# Altium PCB MGMEZZ04.PcbDoc (part 4 of 9)
Units mil, origin at the board's own origin, x right, y up, seen from the top; angles counter-clockwise.
Board outline 3790 x 5472.44 mil, 10 copper layers (TopLayer, InternalPlane1, MidLayer1, InternalPlane2, MidLayer2, MidLayer3, InternalPlane3, MidLayer4, InternalPlane4, BottomLayer), stack 57.08 mil thick; 846 components, 745 nets, 3323 pads, 1906 vias.
Unrouted connection lines stored in the file: 128.
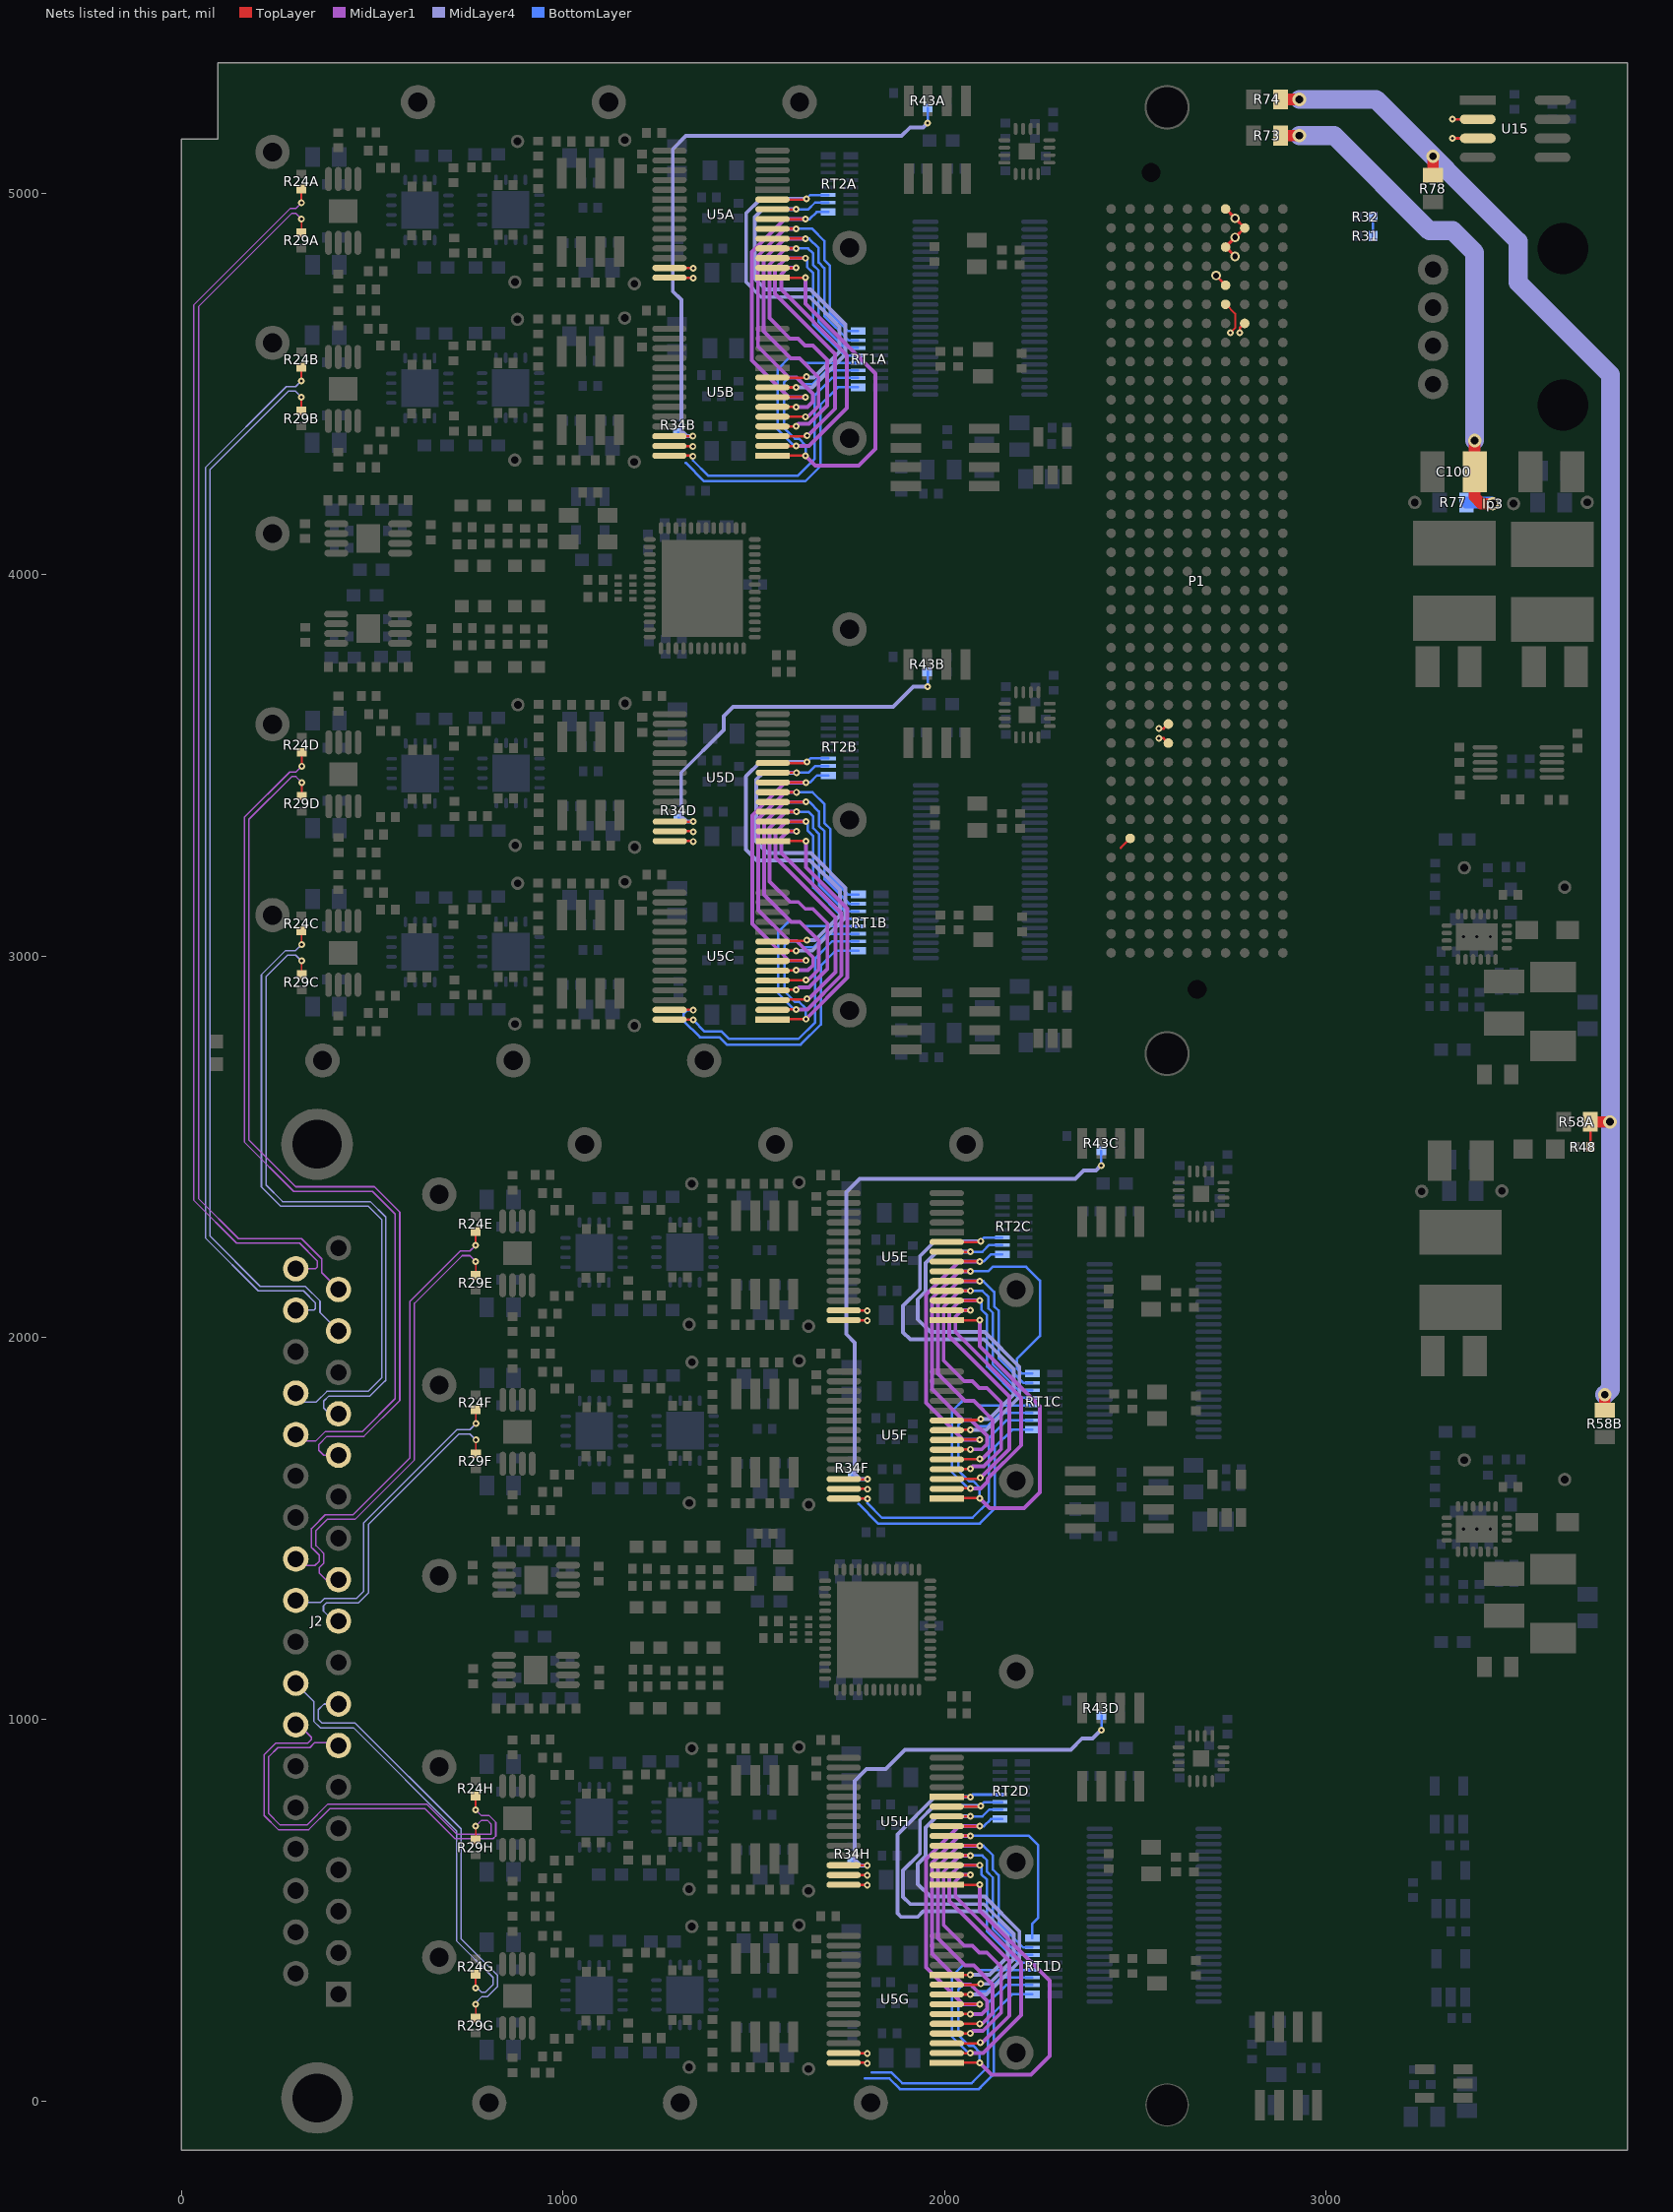
[diagram p12: the nets of this part, all layers, seen from the top]

## Via types
v1: diameter 18, hole 8, TopLayer to BottomLayer, 1296 vias
v2: diameter 18, hole 8, TopLayer to BottomLayer, tented both sides, 203 vias
v3: diameter 19.68, hole 7.87, TopLayer to BottomLayer, 188 vias
v4: diameter 25, hole 15, TopLayer to BottomLayer, tented both sides, 99 vias
v5: diameter 25, hole 15, TopLayer to BottomLayer, 72 vias
v6: diameter 35, hole 20, TopLayer to BottomLayer, 48 vias

## Nets (pads, with @x,y where several pads share a name; then routed paths per layer and width w, separated by ;. In a path a pad name is that pad's centre, name@x,y a point inside that pad or via, vN(x,y) a via of type N, cw(c..) or ccw(c..) an arc to the next point about the centre after c; other vN are vias at no path point) (continued)
DACDATA4G: RT2D.12 U5G.10 U5H.10 | length 1147.7
  TopLayer w6.5: U5G.10@2005.37,330.08 v1(2067.2,330.08) ; U5H.10@2005.61,796.74 v1(2067.44,796.74)
  MidLayer4 w10: v1(2067.2,330.08) 2118.47,330.08 2166.2,377.81 2166.2,431.64 2101.36,496.48 1944.4,496.48 1929.92,482 1886.18,482 1876.44,491.74 1876.44,698.23 1974.95,796.74 v1(2067.44,796.74)
  BottomLayer w6.5: v1(2067.44,796.74) 2073.4,802.69 RT2D.12@2151.5,802.69
DACDATA5A: RT2A.11 U5A.9 U5B.9 | length 1074.7
  TopLayer w6.5: U5B.9@1548.86,4516.79 1635.79,4516.79 v1(1638,4519) ; U5A.9@1549.11,4983.45 1636.03,4983.45 v1(1638.25,4985.66)
  MidLayer4 w10: v1(1638,4519) 1637.91,4519 1635.69,4516.79 1657.58,4516.79 1724.69,4583.9 1724.69,4650.16 1646.79,4728.07 1518.93,4728.07 1480.11,4766.89 1480.11,4947.68 1518.09,4985.66 v1(1638.25,4985.66)
  BottomLayer w6.5: v1(1638.25,4985.66) 1647.9,4995.31 RT2A.11@1695,4995.31
DACDATA5C: RT2B.11 U5C.9 U5D.9 | length 1076.8
  TopLayer w6.5: U5C.9@1549.68,3040.12 1636.6,3040.12 v1(1638.81,3042.34) ; U5D.9@1549.92,3506.79 1636.85,3506.79 v1(1639.06,3509)
  MidLayer4 w10: v1@1638.72,3042.34 1660.61,3042.34 1725.51,3107.24 1725.51,3173.5 1647.6,3251.4 1508.21,3251.4 1479.92,3279.69 1479.92,3471.5 1517.43,3509 v1(1639.06,3509)
  BottomLayer w6.5: v1(1639.06,3509) 1648.71,3518.65 RT2B.11@1695.81,3518.65
DACDATA5E: RT2C.11 U5E.9 U5F.9 | length 1144.1
  TopLayer w6.5: U5F.9@2005.37,1784.48 2092.29,1784.48 v1(2094.5,1786.69) ; U5E.9@2005.61,2251.14 2092.54,2251.14 v1(2094.75,2253.35)
  MidLayer4 w10: v1@2094.41,1786.69 2116.29,1786.69 2181.2,1851.59 2181.2,1917.85 2103.29,1995.76 1910.16,1995.76 1891.44,2014.48 1891.44,2083.94 1935.61,2128.11 1935.61,2214.56 1974.4,2253.35 v1(2094.75,2253.35)
  BottomLayer w6.5: v1(2094.75,2253.35) 2104.4,2263 RT2C.11@2151.5,2263
DACDATA5G: RT2D.11 U5G.9 U5H.9 | length 1145.1
  TopLayer w6.5: U5G.9@2005.37,304.48 2092.29,304.48 v1(2094.5,306.69) ; U5H.9@2005.61,771.14 2092.54,771.14 v1(2094.75,773.35)
  MidLayer4 w10: v1@2094.41,306.69 2116.29,306.69 2181.2,371.59 2181.2,437.85 2103.29,515.76 1910.16,515.76 1891.44,534.48 1891.44,603.94 1935.61,648.11 1935.61,736.19 1972.78,773.35 v1(2094.75,773.35)
  BottomLayer w6.5: v1(2094.75,773.35) 2104.4,783 RT2D.11@2151.5,783
DACDATA6A: RT2A.10 U5A.8 U5B.8 | length 1022.4
  TopLayer w6.5: U5B.8@1548.86,4491.19 v1(1610.69,4491.19) ; U5A.8@1549.11,4957.85 v1(1610.94,4957.85)
  MidLayer4 w10: v1(1610.69,4491.19) 1653.19,4491.19 1739.69,4577.69 1739.69,4656.37 1648.58,4747.49 1531.79,4747.49 1503,4776.28 1503,4937.2 1523.65,4957.85 v1(1610.94,4957.85)
  BottomLayer w6.5: v1(1610.94,4957.85) 1642.85,4957.85 1660.63,4975.63 RT2A.10@1695,4975.63
DACDATA6C: RT2B.10 U5C.8 U5D.8 | length 1017.6
  TopLayer w6.5: U5C.8@1549.68,3014.52 v1(1611.51,3014.52) ; U5D.8@1549.92,3481.19 v1(1611.75,3481.19)
  MidLayer4 w10: v1(1611.51,3014.52) 1654,3014.52 1740.51,3101.03 1740.51,3179.71 1649.4,3270.82 1536.18,3270.82 1507,3300 1507,3463.72 1524.46,3481.19 v1(1611.75,3481.19)
  BottomLayer w6.5: v1(1611.75,3481.19) 1643.66,3481.19 1661.44,3498.97 RT2B.10@1695.81,3498.97
DACDATA6E: RT2C.10 U5E.8 U5F.8 | length 1060.8
  TopLayer w6.5: U5F.8@2005.37,1758.88 v1@2067.2,1758.88 ; U5E.8@2005.61,2225.54 v1(2067.44,2225.54)
  MidLayer4 w10: v1(2067.44,2225.54) 1980.15,2225.54 1950.61,2196 1950.61,2121.89 1929.85,2101.13 1929.85,2048.17 1962.85,2015.18 2105.09,2015.18 2196.2,1924.06 2196.2,1845.38 2109.69,1758.88 v1(2068.2,1758.88)
  BottomLayer w6.5: v1(2067.44,2225.54) 2099.35,2225.54 2117.13,2243.32 RT2C.10@2151.5,2243.32
DACDATA6G: RT2D.10 U5G.8 U5H.8 | length 1061.8
  TopLayer w6.5: U5G.8@2005.37,278.88 v1(2067.2,278.88) ; U5H.8@2005.61,745.54 v1(2067.44,745.54)
  MidLayer4 w10: v1(2067.2,278.88) 2109.69,278.88 2196.2,365.38 2196.2,444.06 2105.09,535.18 1962.85,535.18 1929.85,568.17 1929.85,621.13 1950.61,641.89 1950.61,716 1980.15,745.54 v1(2067.44,745.54)
  BottomLayer w6.5: v1(2067.44,745.54) 2099.35,745.54 2117.13,763.32 RT2D.10@2151.5,763.32
DACDATA7A: RT2A.9 U5A.7 U5B.7 | length 881.8
  TopLayer w6.5: U5B.7@1548.86,4465.59 v1(1635.69,4465.59) ; U5A.7@1549.11,4932.25 v1(1635.94,4932.25)
  MidLayer1 w10: v1(1635.69,4465.59) 1591.41,4465.59 1495,4562 1495,4846 1581.25,4932.25 v1(1635.94,4932.25)
  BottomLayer w6.5: v1(1635.94,4932.25) 1646.22,4932.25 1665,4951.02 RT2A.9@1695,4951.02
DACDATA7C: RT2B.9 U5C.7 U5D.7 | length 881.8
  TopLayer w6.5: U5C.7@1549.68,2988.92 v1(1636.51,2988.92) ; U5D.7@1549.92,3455.59 v1(1636.75,3455.59)
  MidLayer1 w10: v1(1636.51,2988.92) 1592.23,2988.92 1495.81,3085.34 1495.81,3369.34 1582.06,3455.59 v1(1636.75,3455.59)
  BottomLayer w6.5: v1(1636.75,3455.59) 1647.04,3455.59 1665.81,3474.36 RT2B.9@1695.81,3474.36
DACDATA7E: RT2C.9 U5E.7 U5F.7 | length 881.8
  TopLayer w6.5: U5F.7@2005.37,1733.28 v1(2092.2,1733.28) ; U5E.7@2005.61,2199.94 v1(2092.44,2199.94)
  MidLayer1 w10: v1(2092.2,1733.28) 2047.92,1733.28 1951.5,1829.69 1951.5,2113.69 2037.75,2199.94 v1(2092.44,2199.94)
  BottomLayer w6.5: v1(2092.44,2199.94) 2102.73,2199.94 2121.5,2218.71 RT2C.9@2151.5,2218.71
DACDATA7G: RT2D.9 U5G.7 U5H.7 | length 881.8
  TopLayer w6.5: U5G.7@2005.37,253.28 v1(2092.2,253.28) ; U5H.7@2005.61,719.94 v1(2092.44,719.94)
  MidLayer1 w10: v1(2092.2,253.28) 2047.92,253.28 1951.5,349.69 1951.5,633.69 2037.75,719.94 v1(2092.44,719.94)
  BottomLayer w6.5: v1(2092.44,719.94) 2102.73,719.94 2121.5,738.71 RT2D.9@2151.5,738.71
DACDATA8A: RT1A.16 U5A.6 U5B.6 | length 1132
  TopLayer w6.5: U5B.6@1548.86,4439.99 v1(1610.69,4439.99) ; U5A.6@1549.11,4906.65 v1(1610.94,4906.65)
  MidLayer1 w10: v1(1610.69,4439.99) 1640.99,4439.99 1654.69,4453.69 1654.69,4474.31 1612,4517 1592.21,4517 1511,4598.21 1511,4836 1581.65,4906.65 v1(1610.94,4906.65)
  BottomLayer w6.5: v1(1610.94,4906.65) 1653.35,4906.65 1685,4875 1685,4825 1700,4810 1700,4685 1746.02,4638.98 RT1A.16@1773.56,4638.98
DACDATA8C: RT1B.16 U5C.6 U5D.6 | length 1132
  TopLayer w6.5: U5C.6@1549.68,2963.32 v1(1611.51,2963.32) ; U5D.6@1549.92,3429.99 v1(1611.75,3429.99)
  MidLayer1 w10: v1(1611.51,2963.32) 1641.8,2963.32 1655.51,2977.03 1655.51,2997.65 1612.81,3040.34 1593.03,3040.34 1511.81,3121.55 1511.81,3359.34 1582.46,3429.99 v1(1611.75,3429.99)
  BottomLayer w6.5: v1(1611.75,3429.99) 1654.17,3429.99 1685.81,3398.34 1685.81,3348.34 1700.81,3333.34 1700.81,3208.34 1746.84,3162.32 RT1B.16@1774.37,3162.32
DACDATA8E: RT1C.16 U5E.6 U5F.6 | length 1260.2
  TopLayer w6.5: U5F.6@2005.37,1707.68 v1@2067.2,1707.68 ; U5E.6@2005.61,2174.34 v1(2067.44,2174.34)
  MidLayer1 w10: v1@2067.2,1707.68 2097.49,1707.68 2111.2,1721.38 2111.2,1742.75 2069.25,1784.69 2048.72,1784.69 1967.5,1865.9 1967.5,2103.69 2038.15,2174.34 v1(2067.44,2174.34)
  BottomLayer w6.5: v1(2067.44,2174.34) 2114.34,2174.34 2125.95,2185.95 2214.05,2185.95 2250,2150 2250,2004.86 2189.2,1944.06 2189.2,1920 2202.53,1906.67 RT1C.16@2230.06,1906.67
  other v1: 2068.2,1707.68
DACDATA8G: RT1D.16 U5G.6 U5H.6 | length 1193.4
  TopLayer w6.5: U5G.6@2005.37,227.68 v1(2067.2,227.68) ; U5H.6@2005.61,694.34 v1(2067.44,694.34)
  MidLayer1 w10: v1(2067.2,227.68) 2097.49,227.68 2111.2,241.38 2111.2,262 2068.5,304.69 2048.72,304.69 1967.5,385.9 1967.5,623.69 2038.15,694.34 v1(2067.44,694.34)
  BottomLayer w6.5: v1(2067.44,694.34) 2220.83,694.34 2245.28,669.89 2245.28,479.8 2230.06,464.58 RT1D.16@2230.06,426.67
DACDATA9A: RT1A.15 U5A.5 U5B.5 | length 1151.8
  TopLayer w6.5: U5B.5@1548.86,4414.39 v1(1635.69,4414.39) ; U5A.5@1549.11,4881.05 v1(1635.94,4881.05)
  MidLayer1 w10: v1(1635.69,4414.39) 1641.96,4414.39 1669.69,4442.12 1669.69,4517.31 1620,4567 1597,4567 1526,4638 1526,4826 1581.05,4881.05 v1(1635.94,4881.05)
  BottomLayer w6.5: v1(1635.94,4881.05) 1644.9,4881.05 1670,4855.94 1670,4818.79 1685,4803.79 1685,4678.79 1749.42,4614.37 RT1A.15@1773.56,4614.37
DACDATA9C: RT1B.15 U5C.5 U5D.5 | length 1151.8
  TopLayer w6.5: U5C.5@1549.68,2937.72 v1(1636.51,2937.72) ; U5D.5@1549.92,3404.39 v1(1636.75,3404.39)
  MidLayer1 w10: v1(1636.51,2937.72) 1642.77,2937.72 1670.51,2965.46 1670.51,3040.65 1620.81,3090.34 1597.81,3090.34 1526.81,3161.34 1526.81,3349.34 1581.86,3404.39 v1(1636.75,3404.39)
  BottomLayer w6.5: v1(1636.75,3404.39) 1645.71,3404.39 1670.81,3379.28 1670.81,3342.13 1685.81,3327.13 1685.81,3202.13 1750.23,3137.71 RT1B.15@1774.37,3137.71
DACDATA9E: RT1C.15 U5E.5 U5F.5 | length 1151.8
  TopLayer w6.5: U5F.5@2005.37,1682.08 v1(2092.2,1682.08) ; U5E.5@2005.61,2148.74 v1(2092.44,2148.74)
  MidLayer1 w10: v1(2092.2,1682.08) 2098.46,1682.08 2126.2,1709.81 2126.2,1785 2076.5,1834.69 2053.5,1834.69 1982.5,1905.69 1982.5,2093.69 2037.55,2148.74 v1(2092.44,2148.74)
  BottomLayer w6.5: v1(2092.44,2148.74) 2101.4,2148.74 2130,2120.14 2130,2082.98 2141.5,2071.48 2141.5,1946.48 2205.92,1882.06 RT1C.15@2230.06,1882.06
DACDATA9G: RT1D.15 U5G.5 U5H.5 | length 1151.8
  TopLayer w6.5: U5G.5@2005.37,202.08 v1(2092.2,202.08) ; U5H.5@2005.61,668.74 v1(2092.44,668.74)
  MidLayer1 w10: v1(2092.2,202.08) 2098.46,202.08 2126.2,229.81 2126.2,305 2076.5,354.69 2053.5,354.69 1982.5,425.69 1982.5,613.69 2037.55,668.74 v1(2092.44,668.74)
  BottomLayer w6.5: v1(2092.44,668.74) 2101.4,668.74 2126.5,643.64 2126.5,606.48 2141.5,591.48 2141.5,466.48 2205.92,402.06 RT1D.15@2230.06,402.06
DACDATA10A: RT1A.14 U5A.4 U5B.4 | length 1139
  TopLayer w6.5: U5B.4@1548.86,4388.79 v1(1610.69,4388.79) ; U5A.4@1549.11,4855.45 v1(1610.94,4855.45)
  MidLayer1 w10: v1(1610.69,4388.79) 1617.29,4395.39 1644.17,4395.39 1692,4443.21 1692,4563.55 1654.55,4601 1634,4601 1616,4619 1595,4619 1541,4673 1541,4813.16 1583.29,4855.45 v1(1610.94,4855.45)
  BottomLayer w6.5: v1(1610.94,4855.45) 1642.4,4855.45 1655,4842.85 1655,4812.57 1670,4797.57 1670,4663 1738.31,4594.69 RT1A.14@1773.56,4594.69
DACDATA10C: RT1B.14 U5C.4 U5D.4 | length 1139
  TopLayer w6.5: U5C.4@1549.68,2912.12 v1(1611.51,2912.12) ; U5D.4@1549.92,3378.79 v1(1611.75,3378.79)
  MidLayer1 w10: v1(1611.51,2912.12) 1618.11,2918.72 1644.99,2918.72 1692.81,2966.55 1692.81,3086.89 1655.36,3124.34 1634.81,3124.34 1616.81,3142.34 1595.81,3142.34 1541.81,3196.34 1541.81,3336.49 1584.11,3378.79 v1(1611.75,3378.79)
  BottomLayer w6.5: v1(1611.75,3378.79) 1643.22,3378.79 1655.81,3366.19 1655.81,3335.91 1670.81,3320.91 1670.81,3186.34 1739.13,3118.02 RT1B.14@1774.37,3118.02
DACDATA10E: RT1C.14 U5E.4 U5F.4 | length 1140.4
  TopLayer w6.5: U5F.4@2005.37,1656.48 v1@2067.2,1656.48 ; U5E.4@2005.61,2123.14 v1(2067.44,2123.14)
  MidLayer1 w10: v1@2067.2,1656.48 2073.8,1663.08 2103.08,1663.08 2148.5,1708.5 2148.5,1831.24 2111.05,1868.69 2090.5,1868.69 2072.5,1886.69 2051.5,1886.69 1997.5,1940.69 1997.5,2080.85 2039.8,2123.14 v1(2067.44,2123.14)
  BottomLayer w6.5: v1(2067.44,2123.14) 2098.91,2123.14 2115,2107.05 2115,2076.77 2126.5,2065.26 2126.5,1930.69 2194.82,1862.38 RT1C.14@2230.06,1862.38
  other v1: 2068.2,1656.48
DACDATA10G: RT1D.14 U5G.4 U5H.4 | length 1139
  TopLayer w6.5: U5G.4@2005.37,176.48 v1(2067.2,176.48) ; U5H.4@2005.61,643.14 v1(2067.44,643.14)
  MidLayer1 w10: v1(2067.2,176.48) 2073.8,183.08 2100.68,183.08 2148.5,230.9 2148.5,351.24 2111.05,388.69 2090.5,388.69 2072.5,406.69 2051.5,406.69 1997.5,460.69 1997.5,600.85 2039.8,643.14 v1(2067.44,643.14)
  BottomLayer w6.5: v1(2067.44,643.14) 2098.91,643.14 2111.5,630.54 2111.5,600.26 2126.5,585.26 2126.5,450.69 2194.82,382.38 RT1D.14@2230.06,382.38
DACDATA11A: RT1A.13 U5A.3 U5B.3 | length 1147.1
  TopLayer w6.5: U5B.3@1548.86,4363.19 1638.19,4363.19 v1(1640,4365) ; U5A.3@1549.11,4829.85 v1(1635.94,4829.85)
  MidLayer1 w10: v1(1635.94,4829.85) 1584.85,4829.85 1556,4801 1556,4735.87 1713,4578.87 1713,4435 1641.19,4363.19 1635.69,4363.19 1637.51,4365 v1(1640,4365)
  BottomLayer w6.5: v1(1635.94,4829.85) 1640,4825.79 1640,4806.36 1655,4791.36 1655,4656.79 1736.79,4575 RT1A.13@1773.56,4575
DACDATA11C: RT1B.13 U5C.3 U5D.3 | length 1144.1
  TopLayer w6.5: U5C.3@1549.68,2886.52 1636.52,2886.52 v1(1639,2889) ; U5D.3@1549.92,3353.19 v1(1636.75,3353.19)
  MidLayer1 w10: v1(1636.75,3353.19) 1585.66,3353.19 1556.81,3324.34 1556.81,3259.21 1713.81,3102.21 1713.81,2958.34 1642,2886.52 1636.51,2886.52 v1(1639,2889)
  BottomLayer w6.5: v1(1636.75,3353.19) 1640.81,3349.13 1640.81,3329.7 1655.81,3314.7 1655.81,3180.13 1737.6,3098.34 RT1B.13@1774.37,3098.34
DACDATA11E: RT1C.13 U5E.3 U5F.3 | length 1134.4
  TopLayer w6.5: U5F.3@2005.37,1630.88 2092.2,1630.88 2094,1632.68 v1(2094,1633) ; U5E.3@2005.61,2097.54 v1(2092.44,2097.54)
  MidLayer1 w10: v1(2092.44,2097.54) 2041.35,2097.54 2012.5,2068.69 2012.5,2003.56 2169.5,1846.56 2169.5,1708.18 2094,1632.68 v1(2094,1633)
  BottomLayer w6.5: v1(2092.44,2097.54) 2096.5,2093.48 2096.5,2074.05 2111.5,2059.05 2111.5,1924.48 2193.29,1842.69 RT1C.13@2230.06,1842.69
DACDATA11G: RT1D.13 U5G.3 U5H.3 | length 1142.8
  TopLayer w6.5: U5G.3@2005.37,150.88 2092.2,150.88 2094,152.68 v1(2094,153) ; U5H.3@2005.61,617.54 v1(2092.44,617.54)
  MidLayer1 w10: v1(2092.44,617.54) 2041.35,617.54 2012.5,588.69 2012.5,523.56 2169.5,366.56 2169.5,222.69 2097.69,150.88 2092.2,150.88 2094,152.68 v1(2094,153)
  BottomLayer w6.5: v1(2092.44,617.54) 2096.5,613.48 2096.5,594.05 2111.5,579.05 2111.5,444.48 2193.29,362.69 RT1D.13@2230.06,362.69
DACDATA12A: RT1A.12 U5A.2 U5B.2 | length 1218.4
  TopLayer w6.5: U5B.2@1548.86,4337.59 v1(1610.69,4337.59) ; U5A.2@1549.11,4804.25 v1(1610.94,4804.25)
  MidLayer1 w10: v1(1610.69,4337.59) 1644.59,4337.59 1744,4437 1744,4575.61 1572,4747.61 1572,4787.8 1588.44,4804.25 v1(1610.94,4804.25)
  BottomLayer w6.5: v1(1610.69,4337.59) 1605.57,4337.59 1562.84,4380.31 1562.84,4539.47 1591.36,4567.99 1618.94,4567.99 1631.62,4555.32 1722.89,4555.32 RT1A.12@1773.56,4555.32
DACDATA12C: RT1B.12 U5C.2 U5D.2 | length 1203.5
  TopLayer w6.5: U5C.2@1549.68,2860.92 v1(1611.51,2860.92) ; U5D.2@1549.92,3327.59 v1(1611.75,3327.59)
  MidLayer1 w10: v1(1611.51,2860.92) 1640.89,2860.92 1730,2950.03 1730,3113.77 1572.81,3270.95 1572.81,3311.14 1589.26,3327.59 v1(1611.75,3327.59)
  BottomLayer w6.5: v1(1611.51,2860.92) 1606.39,2860.92 1563.66,2903.65 1563.66,3062.81 1592.18,3091.32 1619.76,3091.32 1632.43,3078.65 RT1B.12@1774.37,3078.65
DACDATA12E: RT1C.12 U5E.2 U5F.2 | length 1215
  TopLayer w6.5: U5F.2@2005.37,1605.28 v1@2067.2,1605.28 ; U5E.2@2005.61,2071.94 v1(2067.44,2071.94)
  MidLayer1 w10: v1@2067.2,1605.28 2095.28,1605.28 2113,1623 2113,1630.47 2200.5,1717.97 2200.5,1843.31 2028.5,2015.31 2028.5,2055.49 2044.95,2071.94 v1(2067.44,2071.94)
  BottomLayer w6.5: v1@2067.2,1605.28 2062.08,1605.28 2019.35,1648 2019.35,1807.16 2047.87,1835.68 2075.45,1835.68 2088.12,1823.01 RT1C.12@2230.06,1823.01
  other v1: 2068.2,1605.28
DACDATA12G: RT1D.12 U5G.2 U5H.2 | length 1218.4
  TopLayer w6.5: U5G.2@2005.37,125.28 v1(2067.2,125.28) ; U5H.2@2005.61,591.94 v1(2067.44,591.94)
  MidLayer1 w10: v1(2067.2,125.28) 2101.09,125.28 2200.5,224.69 2200.5,363.31 2028.5,535.31 2028.5,575.49 2044.95,591.94 v1(2067.44,591.94)
  BottomLayer w6.5: v1(2067.2,125.28) 2062.08,125.28 2019.35,168 2019.35,327.16 2047.87,355.68 2075.45,355.68 2088.12,343.01 RT1D.12@2230.06,343.01
DACDATA13A: RT1A.11 U5A.1 U5B.1 | length 1352.3
  TopLayer w6.5: U5B.1@1548.86,4311.99 v1(1635.69,4311.99) ; U5A.1@1549.11,4778.65 v1(1635.94,4778.65)
  MidLayer1 w10: v1(1635.69,4311.99) 1661.68,4286 1775,4286 1819,4330 1819,4527 1635.94,4710.06 v1(1635.94,4778.65)
  BottomLayer w6.5: v1(1635.69,4311.99) 1635.69,4339.46 1618.56,4356.59 1607.78,4356.59 1580,4384.37 1580,4505 1590.95,4515.95 1611.75,4515.95 1617.51,4510.19 1618.56,4510.19 1628.75,4500 1655,4500 1690.63,4535.63 RT1A.11@1773.56,4535.63
DACDATA13C: RT1B.11 U5C.1 U5D.1 | length 1171.9
  TopLayer w6.5: U5C.1@1549.68,2835.32 v1(1636.51,2835.32) ; U5D.1@1549.92,3301.99 v1(1636.75,3301.99)
  MidLayer1 w10: v1(1636.51,2835.32) 1745,2943.82 1745,3125.15 1636.75,3233.4 v1(1636.75,3301.99)
  BottomLayer w6.5: v1(1636.51,2835.32) 1636.51,2862.79 1619.38,2879.92 1608.6,2879.92 1580.81,2907.71 1580.81,3028.34 1591.76,3039.28 1612.57,3039.28 1618.33,3033.52 1619.38,3033.52 1629.56,3023.34 1655.81,3023.34 1691.44,3058.97 RT1B.11@1774.37,3058.97
DACDATA13E: RT1C.11 U5E.1 U5F.1 | length 1317.9
  TopLayer w6.5: U5F.1@2005.37,1579.68 v1(2092.2,1579.68) ; U5E.1@2005.61,2046.34 v1(2092.44,2046.34)
  MidLayer1 w10: v1(2092.2,1579.68) 2118.18,1553.69 2208.86,1553.69 2250,1594.83 2250,1820.2 2092.44,1977.75 v1(2092.44,2046.34)
  BottomLayer w6.5: v1(2092.2,1579.68) 2092.2,1607.15 2075.07,1624.28 2064.29,1624.28 2036.5,1652.06 2036.5,1772.69 2047.45,1783.64 2068.26,1783.64 2074.02,1777.88 2075.07,1777.88 2085.25,1767.69 2111.5,1767.69 2147.13,1803.32 RT1C.11@2230.06,1803.32
DACDATA13G: RT1D.11 U5G.1 U5H.1 | length 1356.7
  TopLayer w6.5: U5G.1@2005.37,99.68 v1(2092.2,99.68) ; U5H.1@2005.61,566.34 v1(2092.44,566.34)
  MidLayer1 w10: v1(2092.2,99.68) 2123.52,68.36 2226.17,68.36 2275.5,117.69 2275.5,314.69 2092.44,497.75 v1(2092.44,566.34)
  BottomLayer w6.5: v1(2092.2,99.68) 2092.2,127.15 2075.07,144.28 2064.29,144.28 2036.5,172.06 2036.5,292.69 2047.45,303.64 2068.26,303.64 2074.02,297.88 2075.07,297.88 2085.25,287.69 2111.5,287.69 2147.13,323.32 RT1D.11@2230.06,323.32
DACDATA14A: RT1A.10 U5A.28 U5B.28 | length 776.7
  TopLayer w6.5: U5B.28@1278.86,4311.99 v1@1340.69,4311.99 ; U5A.28@1279.11,4778.65 v1@1340.94,4778.65
  BottomLayer w6.5: 1340.69,4299.54 1380.23,4260 1616,4260 1660,4304 1660,4470.84 1705.1,4515.95 1725.95,4515.95 RT1A.10@1773.56,4515.95
  other v1: 1340.69,4310.99 1340.94,4777.65
DACDATA14C: RT1B.10 U5C.28 U5D.28 | length 781.2
  TopLayer w6.5: U5C.28@1279.31,2834.02 v1@1341.14,2834.02 ; U5D.28@1279.92,3301.99 v1@1341.75,3301.99
  BottomLayer w6.5: v1(1341.14,2833.02) 1371.3,2802.86 1416.01,2802.86 1435.52,2783.34 1616.81,2783.34 1660.81,2827.34 1660.81,2994.18 1705.92,3039.28 RT1B.10@1774.37,3039.28
  other v1: 1341.75,3300.99
DACDATA14E: RT1C.10 U5E.28 U5F.28 | length 776
  TopLayer w6.5: U5E.28@1735.61,2046.34 v1@1797.44,2046.34 ; U5F.28@1736,1578.63 v1@1797.83,1578.63
  BottomLayer w6.5: 1797.2,1567.23 1835.96,1528.47 2073.28,1528.47 2116.5,1571.69 2116.5,1738.54 2161.61,1783.64 RT1C.10@2230.06,1783.64
  other v1: 1797.83,1577.63 1797.44,2045.34
DACDATA14G: RT1D.10 U5G.28 U5H.28 | length 761
  TopLayer w6.5: U5G.28@1735.61,99.63 v1@1797.44,99.63 ; U5H.28@1735.61,566.34 v1@1797.44,566.34
  BottomLayer w6.5: 1808.82,74 1861.21,74 1889.21,46 2070.81,46 2074.81,50 2113.46,88.65 2113.46,255.49 2161.61,303.64 RT1D.10@2230.06,303.64
  other v1: 1797.44,98.63 1797.44,565.34
DACDATA15A: RT1A.9 U5A.27 U5B.27 | length 791.8
  TopLayer w6.5: U5B.27@1278.86,4337.59 v1@1340.69,4337.59 ; U5A.27@1279.11,4804.25 v1@1340.94,4804.25
  BottomLayer w6.5: 1321.69,4293.31 1370,4245 1635,4245 1675,4285 1675,4445.81 1720.53,4491.34 RT1A.9@1773.56,4491.34
  other v1: 1340.69,4336.59 1340.94,4803.25
DACDATA15C: RT1B.9 U5C.27 U5D.27 | length 848
  TopLayer w6.5: U5C.27@1279.31,2859.62 v1@1341.14,2859.62 ; U5D.27@1279.92,3327.59 v1@1341.75,3327.59
  BottomLayer w6.5: v1(1341.14,2858.62) 1325.62,2858.62 1315.86,2848.86 1315.86,2830.92 1358.93,2787.86 1409.79,2787.86 1429.31,2768.34 1623.03,2768.34 1675.81,2821.13 1675.81,2975.81 1714.68,3014.68 RT1B.9@1774.37,3014.68
  other v1: 1341.75,3326.59
DACDATA15E: RT1C.9 U5E.27 U5F.27 | length 796.5
  TopLayer w6.5: U5E.27@1735.61,2071.94 v1@1797.44,2071.94 ; U5F.27@1736,1604.23 v1@1797.83,1604.23
  BottomLayer w6.5: 1774.37,1564.82 1825.73,1513.47 2092.28,1513.47 2131.5,1552.69 2131.5,1713.5 2177.04,1759.03 RT1C.9@2230.06,1759.03
  other v1: 1797.83,1603.23 1797.44,2070.94
DACDATA15G: RT1D.9 U5G.27 U5H.27 | length 771.3
  TopLayer w6.5: U5G.27@1735.61,125.23 v1@1797.44,125.23 ; U5H.27@1735.61,591.94 v1@1797.44,591.94
  BottomLayer w6.5: 1790.93,59 1855,59 1883,31 2089.81,31 2093.81,35 2128.46,69.64 2128.46,230.45 2177.04,279.03 RT1D.9@2230.06,279.03
  other v1: 1797.44,124.23 1797.44,590.94
DACOUTA_N: J2.18 R29A.2 | length 3238.8
  TopLayer w4.5: R29A.2@314.75,4896 315,4896.25 v1(315,4932.3)
  MidLayer1 w4: v1(315,4932.3) 299.65,4947.65 290,4947.65 45,4702.65 45,2365 150,2260 314.97,2260 367.91,2207.07 367.91,2170.61 J2.18@411.81,2126.71
DACOUTA_P: J2.37 R24A.2 | length 3239.5
  TopLayer w4.5: R24A.2@314.75,5011.15 314.75,4975.25 v1(315,4975)
  MidLayer1 w4: J2.37@300,2181 351.86,2181 355.91,2185.04 355.91,2202.1 310,2248 145.03,2248 33,2360.03 33,4707.62 285.03,4959.65 299.65,4959.65 v1(315,4975)
DACOUTB_N: J2.17 R29B.2 | length 2834.2
  TopLayer w4.5: R29B.2@314.51,4429.34 314.75,4429.58 v1(314.75,4465.63)
  MidLayer4 w4: v1(314.75,4465.63) 299.4,4480.99 280,4480.99 75,4275.99 75,2266.69 206.69,2135 325,2135 363.51,2096.49 363.51,2066.34 J2.17@411.81,2018.05
DACOUTB_P: J2.36 R24B.2 | length 2828.7
  TopLayer w4.5: R24B.2@314.51,4544.49 314.51,4508.58 v1(314.75,4508.34)
  MidLayer4 w4: J2.36@300,2072.34 347.34,2072.34 351.51,2076.51 351.51,2091.51 320.03,2123 201.72,2123 63,2261.72 63,4280.96 275.03,4492.99 299.4,4492.99 v1(314.75,4508.34)
DACOUTC_N: J2.15 R29C.2 | length 1730.2
  TopLayer w4.5: R29C.2@314.95,2951.37 R29C.2@315.2,2951.62 v1(315.2,2987.67)
  MidLayer4 w4: v1(315.2,2987.67) 299.85,3003.02 278,3003.02 222,2947.02 222,2400.42 265.42,2357 494.97,2357 535.44,2316.53 535.44,1888.47 528,1881.03 494.43,1847.46 386.43,1847.46 373,1834.03 373,1816 388.28,1800.72 J2.15@411.81,1800.72
DACOUTC_P: J2.34 R24C.2 | length 1756.5
  TopLayer w4.5: R24C.2@314.95,3066.52 314.95,3030.62 v1(315.2,3030.37)
  MidLayer4 w4: J2.34@300,1855.02 323.02,1832 354,1832 381.46,1859.46 489.46,1859.46 525,1895 525,2310 490,2345 260.45,2345 210,2395.45 210,2951.99 273.03,3015.02 299.85,3015.02 v1(315.2,3030.37)
DACOUTD_N: J2.14 R29D.2 | length 2368.6
  TopLayer w4.5: R29D.2@315.57,3419.34 R29D.2@315.81,3419.58 v1(315.81,3455.63)
  MidLayer1 w4: v1(315.81,3455.63) 300.46,3470.99 289,3470.99 177,3358.99 177,2518.68 299.68,2396 505.97,2396 572.48,2329.5 572.48,1835.5 478.6,1741.63 381.63,1741.63 360,1720 360,1705 372.94,1692.06 J2.14@411.81,1692.06
DACOUTD_P: J2.33 R24D.2 | length 2363.9
  TopLayer w4.5: R24D.2@315.57,3534.49 315.57,3498.58 v1(315.81,3498.34)
  MidLayer1 w4: J2.33@300,1746.35 316.35,1730 353.03,1730 376.66,1753.63 473.63,1753.63 560.48,1840.48 560.48,2324.52 501,2384 294.71,2384 165,2513.71 165,3363.96 284.03,3482.99 300.46,3482.99 v1(315.81,3498.34)
DACOUTE_N: J2.11 R29E.2 | length 1182.7
  TopLayer w4.5: R29E.2@771.26,2163.69 R29E.2@771.5,2163.94 v1(771.5,2199.99)
  MidLayer1 w4: J2.11@411.81,1366.08 378.92,1366.08 361,1384 361,1397.03 369.76,1405.79 373.28,1409.31 373.28,1435.12 369.76,1438.63 353,1455.39 353,1495 382,1524 455,1524 611,1680 611,2090.34 736,2215.34 756.15,2215.34 v1(771.5,2199.99)
DACOUTE_P: J2.30 R24E.2 | length 1182
  TopLayer w4.5: R24E.2@771.26,2278.84 771.26,2242.94 v1(771.5,2242.69)
  MidLayer1 w4: J2.30@300,1420.37 317.37,1403 350,1403 361.28,1414.28 361.28,1430.14 344.51,1446.91 341,1450.42 341,1499.97 344.51,1503.49 377.03,1536 450.03,1536 599,1684.97 599,2095.31 731.03,2227.34 756.15,2227.34 v1(771.5,2242.69)
DACOUTF_N: J2.10 R29F.2 | length 797.6
  TopLayer w4.5: R29F.2@771.64,1695.98 R29F.2@771.89,1696.23 v1(771.89,1732.28)
  MidLayer4 w4: J2.10@411.81,1257.42 398.75,1257.42 372.49,1283.68 372.49,1297.51 379.97,1305 463.97,1305 490,1331.03 490,1510.24 727.39,1747.63 756.54,1747.63 v1(771.89,1732.28)
DACOUTF_P: J2.29 R24F.2 | length 809.7
  TopLayer w4.5: R24F.2@771.64,1811.13 771.64,1775.23 v1(771.89,1774.98)
  MidLayer4 w4: J2.29@300,1311.71 305.71,1306 364,1306 375,1317 459,1317 478,1336 478,1515.21 722.42,1759.63 756.54,1759.63 v1(771.89,1774.98)
DACOUTG_N: J2.8 R29G.2 | length 1141.3
  TopLayer w4.5: R29G.2@771.26,216.98 R29G.2@771.5,217.23 v1(771.5,253.28)
  MidLayer4 w4: J2.8@411.81,1040.09 374.09,1040.09 359,1025 359,1000 369,990 455.97,990 733,712.97 733,424.66 829,328.66 829,299.91 801.72,272.63 786.86,272.63 v1@771.5,257.28
DACOUTG_P: J2.27 R24G.2 | length 1151.1
  TopLayer w4.5: R24G.2@771.26,332.13 771.26,296.23 v1(771.5,295.98)
  MidLayer4 w4: J2.27@300,1094.39 347,1047.39 347,995.03 364.03,978 451,978 721,708 721,419.69 817,323.69 817,304.88 796.75,284.63 786.86,284.63 v1@771.5,299.98
DACOUTH_N: J2.7 R29H.2 | length 1114.5
  TopLayer w4.5: R29H.2@771.26,683.69 R29H.2@771.5,683.94 v1(771.5,719.99)
  MidLayer1 w4: J2.7@411.81,931.43 404.73,938.51 349.49,938.51 336.97,926 253,926 229,902 229,753 259,723 329.03,723 384.03,778 643,778 722,699 812,699 812,725.34 802,735.34 786.86,735.34 v1(771.5,719.99)
DACOUTH_P: J2.26 R24H.2 | length 1179.3
  TopLayer w4.5: R24H.2@771.26,798.84 771.26,762.94 v1(771.5,762.69)
  MidLayer1 w4: J2.26@300,985.72 308.28,985.72 341,953 341,947 332,938 248.03,938 217,906.97 217,748.03 254.03,711 334,711 389,766 638.03,766 717.03,687 816.97,687 824,694.03 824,730.31 806.97,747.34 786.86,747.34 v1(771.5,762.69)
FASTDACCLKB: R34B.2 R43A.2 U5B.26 | length 1624.9
  TopLayer w6.5: U5B.26@1277.86,4362.99 v1@1341.69,4362.99
  MidLayer4 w10: v1@1339.34,4363.34 1339.69,4362.99 1324.71,4362.99 1310,4377.7 1310,4720.86 1287.86,4743 1287.86,5116.11 1321.76,5150 1887.61,5150 1909.85,5172.24 1944.07,5172.24 v1(1956.01,5184.16)
  BottomLayer w6.5: R34B.2@1301.86,4372.62 1311.49,4362.99 v1@1339.69,4362.99 ; v1(1956.01,5184.16) R43A.2@1956.01,5223.23
  other v1: 1340.69,4362.99
FASTDACCLKD: R34D.2 R43B.2 U5D.26 | length 1057.3
  TopLayer w6.5: U5D.26@1278.92,3352.99 v1@1342.75,3352.99
  MidLayer4 w10: v1@1340.4,3353.34 v1@1340.75,3352.99 ; v1(1341.75,3352.99) 1324.87,3352.99 1309.7,3368.16 1309.7,3481.7 1421.68,3593.68 1421.68,3629.68 1445.79,3653.79 1865.46,3653.79 1918.14,3706.46 v1(1955.71,3706.45)
  BottomLayer w6.5: R34D.2@1302.92,3362.62 1312.55,3352.99 v1@1340.75,3352.99 ; v1(1955.71,3706.45) R43B.2@1955.71,3745.52
FASTDACCLKF: R34F.2 R43C.2 U5F.26 | length 1625
  TopLayer w6.5: U5F.26@1735,1629.63 v1@1798.83,1629.63
  MidLayer4 w10: v1@1796.83,1629.63 1779.1,1629.63 1764.39,1644.34 1764.39,1987.51 1742.26,2009.64 1742.26,2382.26 1777,2417 2342.36,2417 2364.25,2438.89 2396.48,2438.89 v1@2409.9,2452.31
  BottomLayer w6.5: R34F.2@1759,1639.26 1768.63,1629.63 v1@1796.83,1629.63 ; v1@2410.4,2452.81 R43C.2@2410.4,2489.87
  other v1: 1797.83,1629.63 2410.4,2451.81
FASTDACCLKH: R34H.2 R43D.2 U5H.26 | length 1089.6
  TopLayer w6.5: U5H.26@1734.61,617.34 v1@1798.44,617.34
  MidLayer4 w10: v1@1796.44,617.34 1779.56,617.34 1764.39,632.51 1764.39,838.42 1795.98,870 1845.86,870 1895.86,920 2330.59,920 2359.88,949.29 2387.89,949.29 v1@2411.4,972.81
  BottomLayer w6.5: R34H.2@1758.61,626.97 1768.24,617.34 v1@1796.44,617.34 ; v1@2411.4,972.81 R43D.2@2411.4,1009.87
  other v1: 1797.44,617.34 2411.4,971.81
FMC_2V5_ADJ: C100.1 Ip3.1 R73.2 R77.1 | length 1401.6
  TopLayer w30: R73.2@2880,5151 v6(2929.65,5151) ; v6(3389,4351.88) C100.1@3389,4270 3389,4204 3406.58,4186.42 Ip3.1@3436.65,4186.42
  MidLayer4 w50: v6(2929.65,5151) 3021,5151 3270.35,4901.65 3331.73,4901.65 3389,4844.38 v6(3389,4351.88)
  BottomLayer w30: R77.1@3367.65,4189.42 3433.65,4189.42 Ip3.1@3436.65,4186.42
FMC_3V3: P1.C39 P1.D36 P1.D38 P1.D40 R31.1 R32.1 | length 262.1
  TopLayer w6.5: v4(2711.34,4784.33) P1.D36@2736.34,4759.33
  TopLayer w8: P1.D40@2736.34,4959.33 v4(2761.34,4934.33) 2786.34,4909.33 v4(2761.34,4884.33) 2736.34,4859.33 v4(2761.34,4834.33)
  BottomLayer w6.5: R31.1@3123,4887.83 R32.1@3123,4937.83
FMC_12V: R48.1 R58A.2 R58B.2 R74.2 R78.2 | length 4105.5
  TopLayer w6.5: R58A.2@3692,2566 3692.67,2565.33 R48.1@3692.67,2500
  TopLayer w30: R74.2@2880,5246 v6(2929.65,5246) ; R78.2@3280,5056 v6(3280,5096.65) ; R58A.2@3692,2566 v6(3743.65,2566) ; R58B.2@3730,1810 v6(3730,1850.65)
  MidLayer4 w50: v6(2929.65,5246) 3130.65,5246 3503,4873.65 3503,4766 3745,4524 3745,2740.16 3745,1864.65 ; v6(3730,1850.65) 3744,1864.65
FMCIO_RN: P1.J7 | length 35.4
  TopLayer w6.5: 2461.34,3284.33 P1.J7@2486.34,3309.33
FMCSYNC_N: P1.G13 | length 30.2
  TopLayer w6.5: v2(2561.34,3596.83) 2573.84,3596.83 P1.G13@2586.34,3609.33
FMCSYNC_P: P1.G12 | length 30.2
  TopLayer w6.5: v2(2561.34,3571.83) 2573.84,3571.83 P1.G12@2586.34,3559.33
GA0: P1.C34 U15.3 | length 96.1
  TopLayer w6.5: v2(2773.84,4634.33) 2773.84,4646.83 P1.C34@2786.34,4659.33 ; v1(3331.03,5144) U15.3@3397,5144
GA1: P1.D35 U15.2 | length 156.5
  TopLayer w5: P1.D35@2736.34,4709.33 2761.34,4684.33 2761.34,4646.83 v2(2748.84,4634.33)
  TopLayer w6.5: v1(3331.03,5194) U15.2@3397,5194